# Altium PCB BUOI13.PcbDoc
Units mm, origin at the board's own origin, x right, y up, seen from the top; angles counter-clockwise.
Board outline 60 x 90 mm, 4 copper layers (Top Layer, Power, Ground, Bottom Layer), stack 0.778 mm thick; 114 components, 130 nets, 387 pads, 26 vias.
Unrouted connection lines stored in the file: 1.
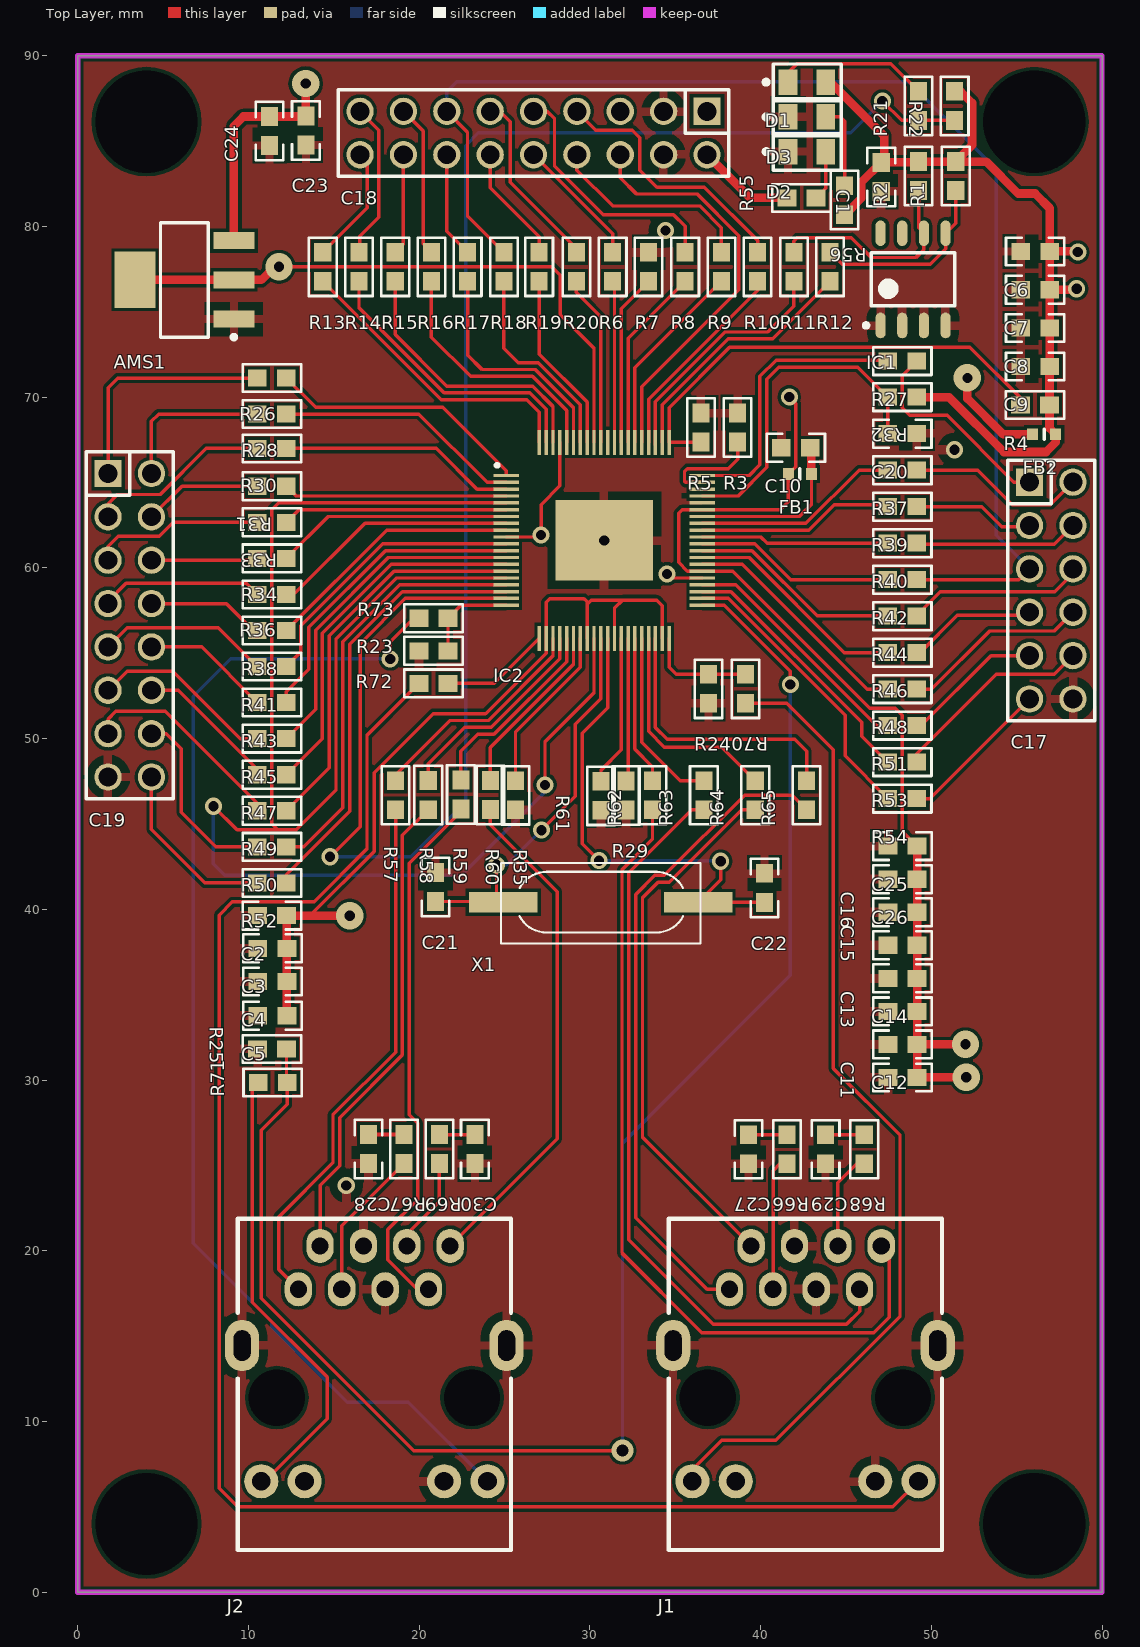
[diagram p0: Top Layer view]
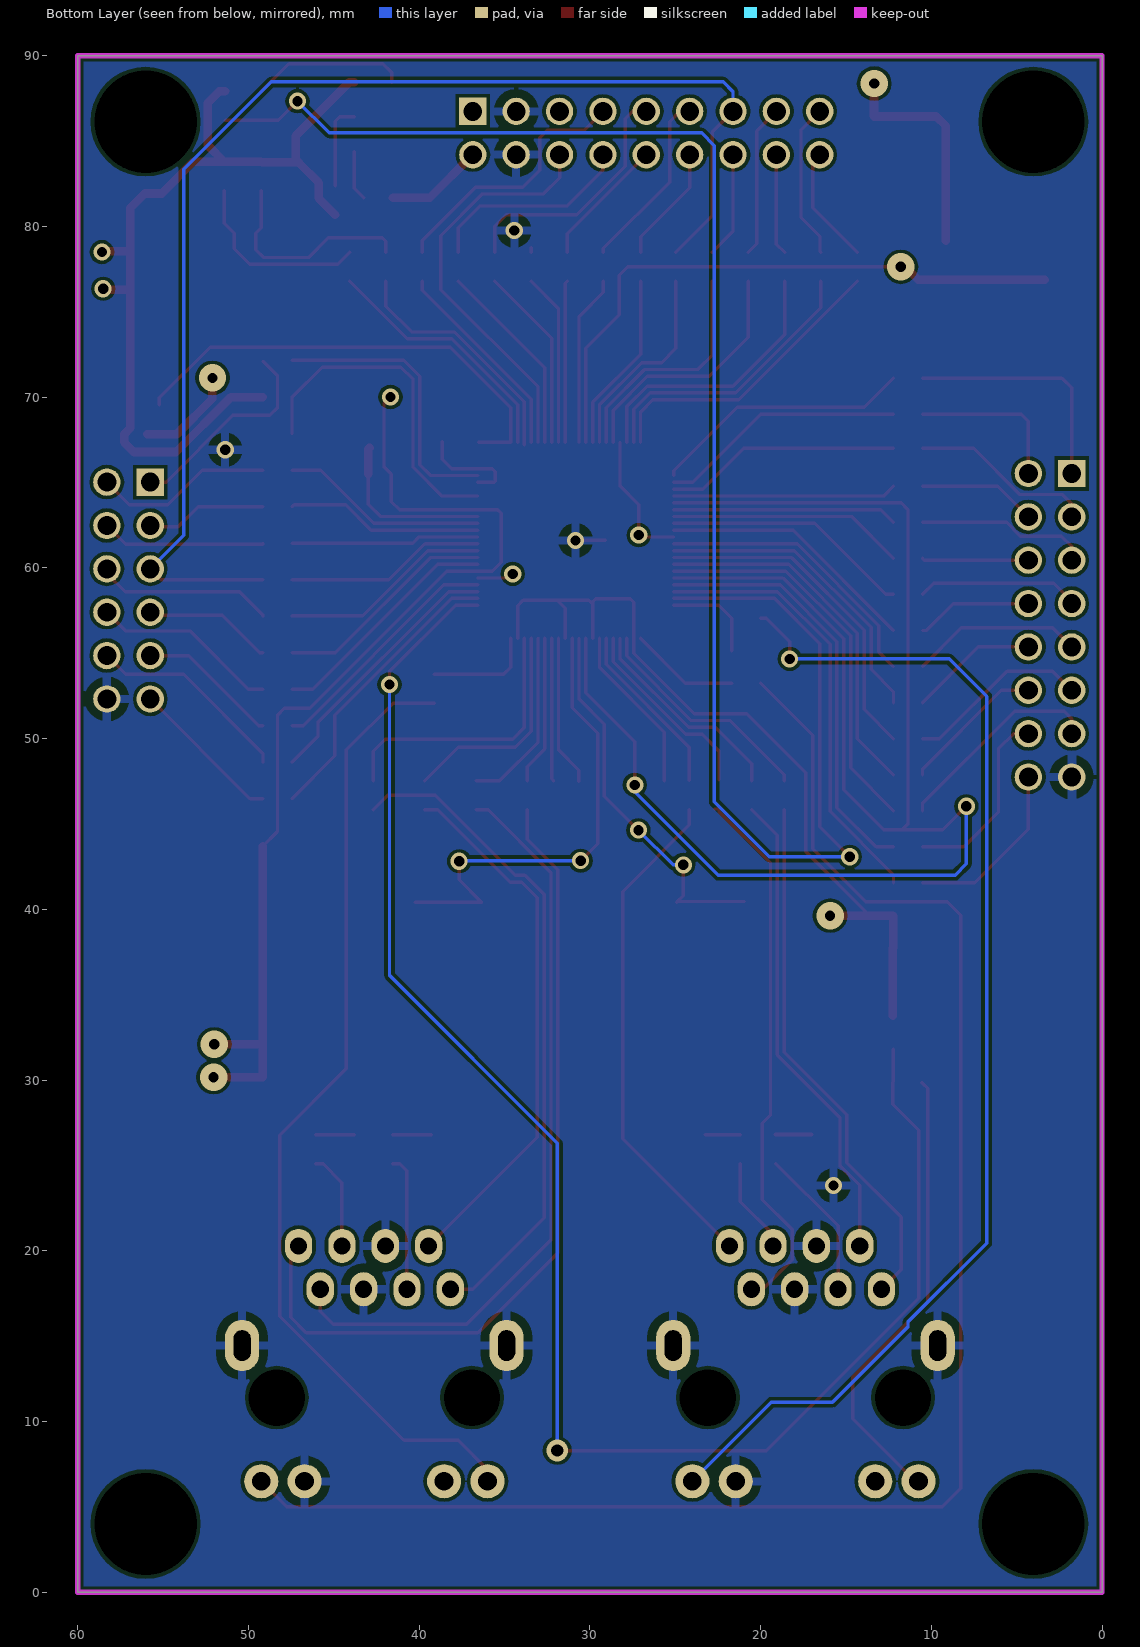
[diagram p1: Bottom Layer view, seen from below]
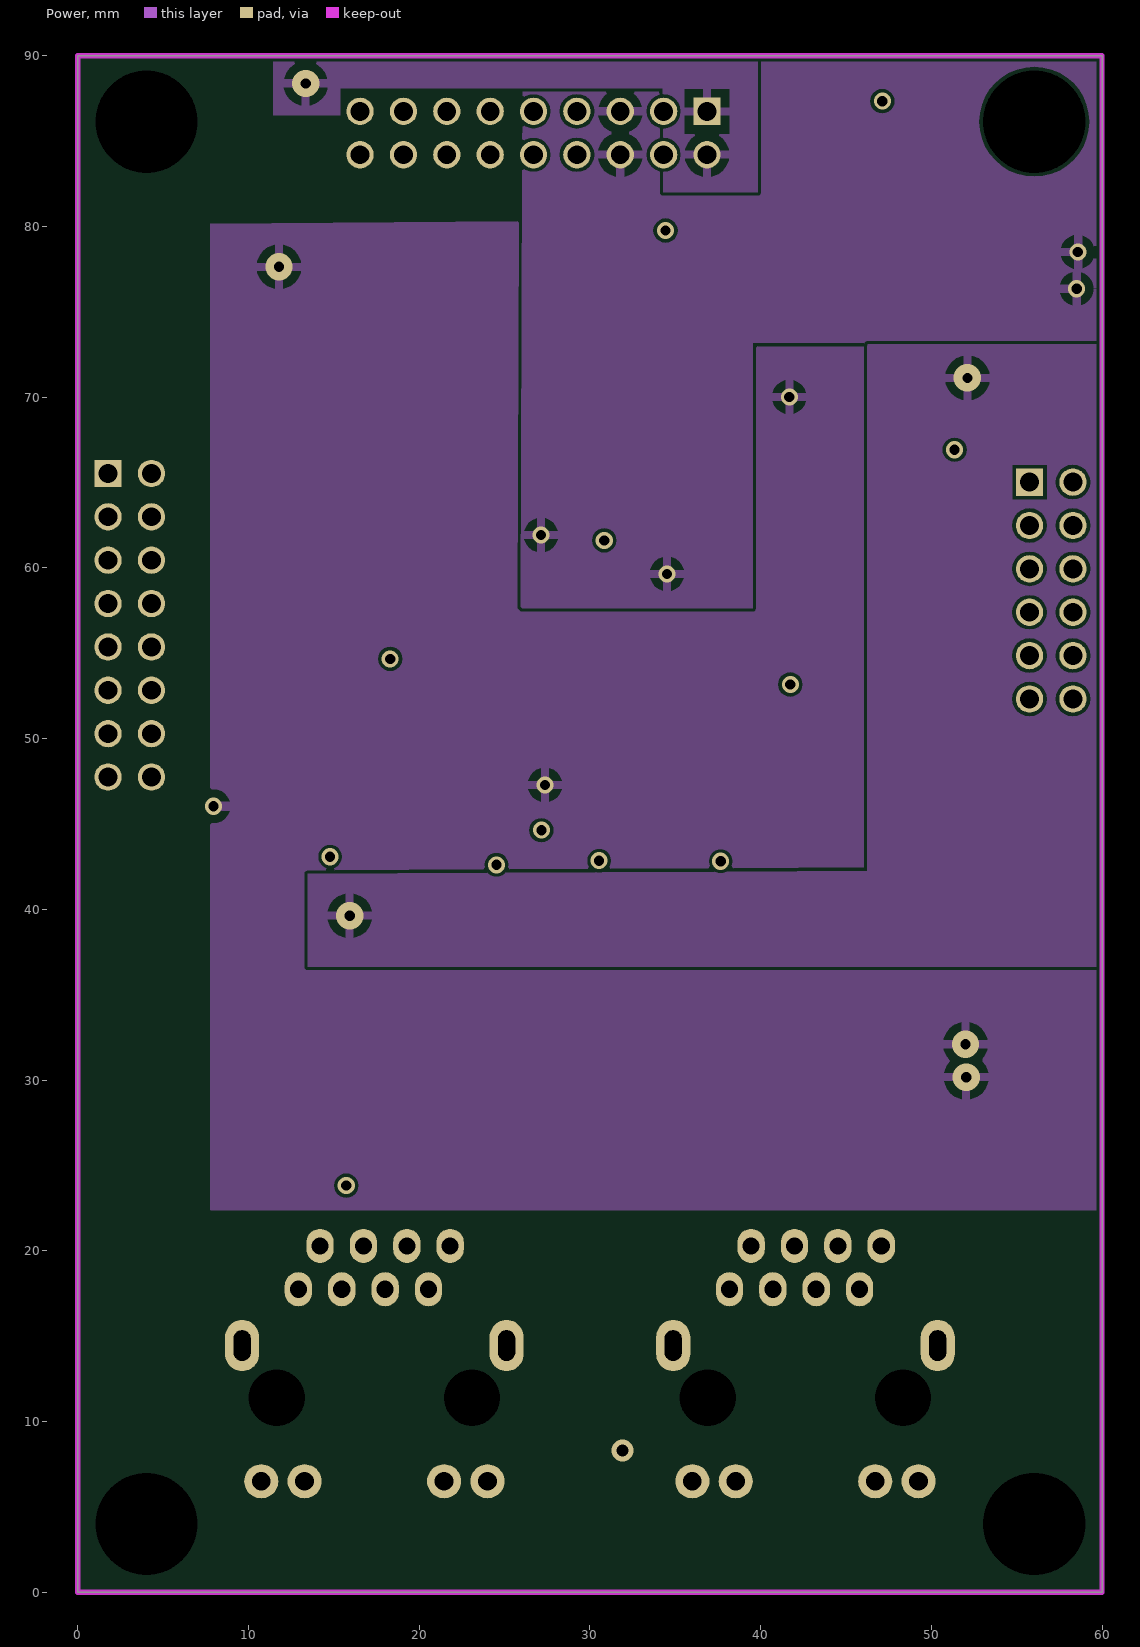
[diagram p2: Power]
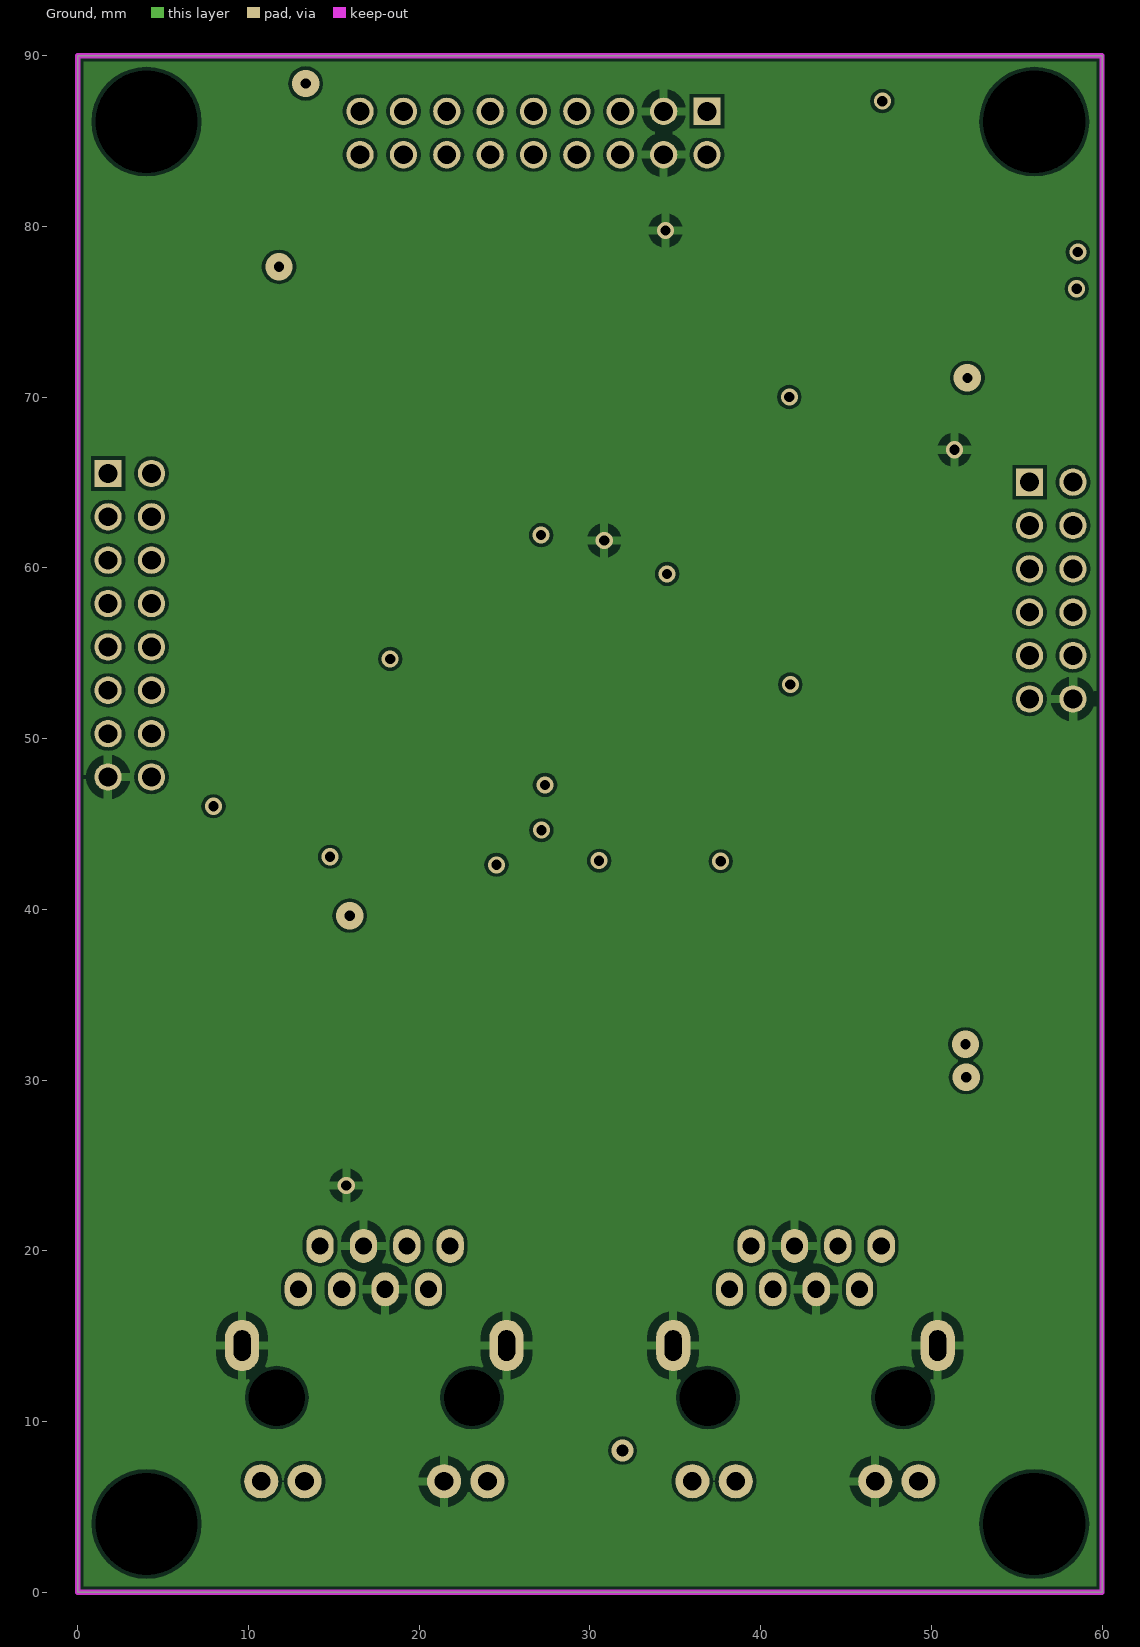
[diagram p3: Ground]
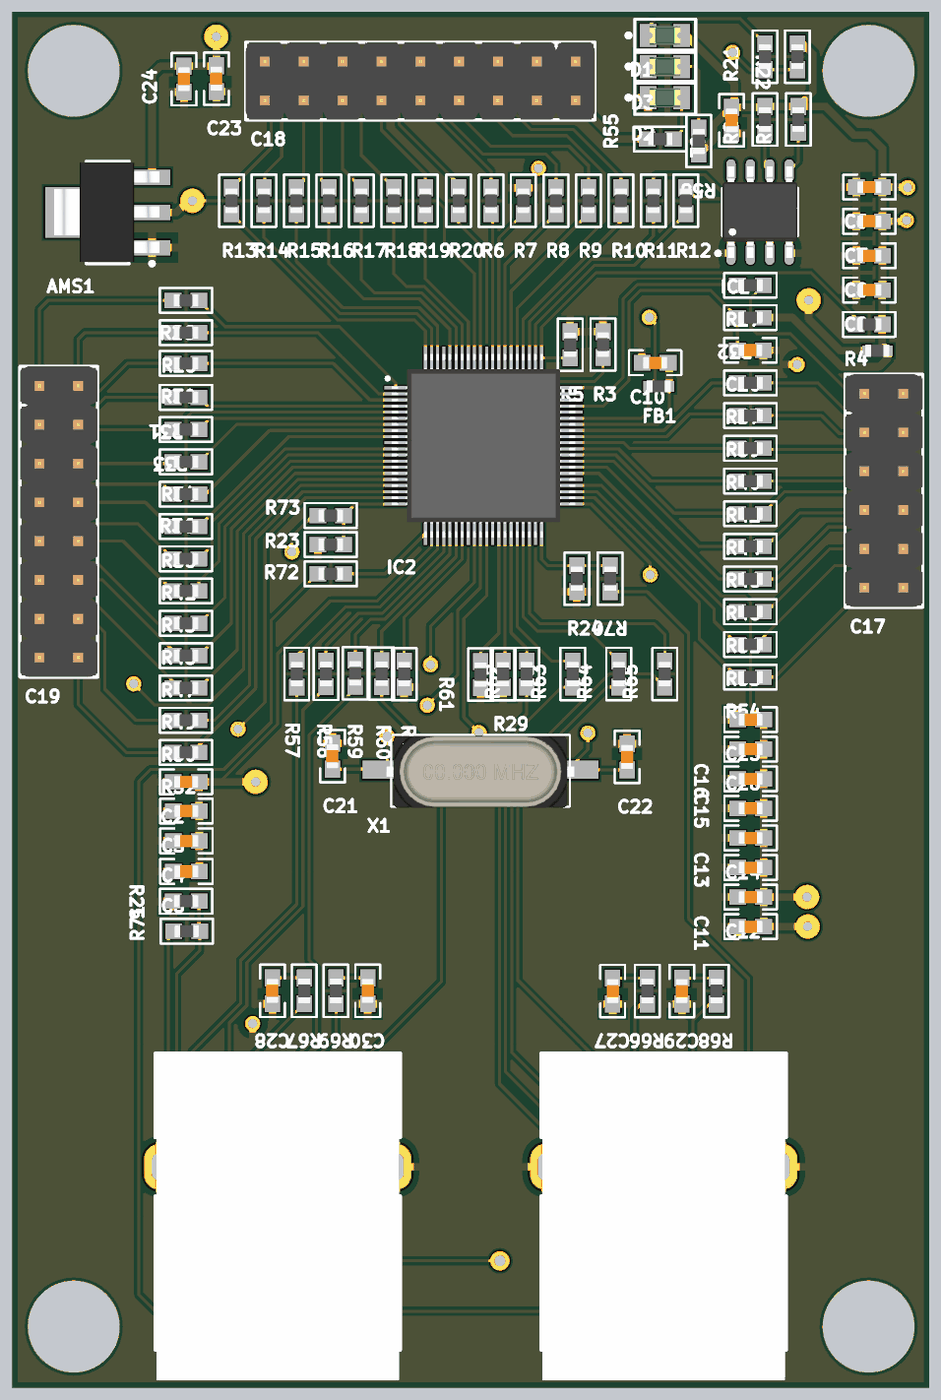
[diagram p4: 3D render of the assembled board from above, using the file's embedded part models]

## Layer stack, top to bottom
Top Solder: solder mask 0.0102, Solder Resist, Dk 3.5
Top Layer: signal copper 0.0356
Dielectric 1: core 0.254, FR-4, Dk 4.2
Power: signal copper 0.036
Dielectric 3: prepreg 0.127, Dk 4.2
Ground: signal copper 0.036
Dielectric 2: core 0.254, Dk 4.2
Bottom Layer: signal copper 0.0356
Bottom Solder: solder mask 0.0102, Solder Resist, Dk 3.5

## Board outline
0,0 60,0 60,90 0,90

## Design rules (kind name [scope] priority, off if disabled: settings)
Clearance [All] p1: gap=0.2 ignorepadtopadclearanceinfootprint=FALSE
PolygonConnect [All] p1: connectstyle=Relief reliefconductorwidth=0.5 reliefentries=4 polygonreliefangle="90 Angle" airgapwidth=0.5
RoutingVias [All] p1: holewidth=0.711 width=1.27 viastyle="Through Hole" minholewidth=0.711 minwidth=1.27 maxholewidth=0.711 maxwidth=1.27
SolderMaskExpansion [All] p1: expansion=0.102
Width [All] p1: maxlimit=0.5 minlimit=0.2 preferedwidth=0.2
30 further rules are at their usual default settings.

## Components (designator, comment, footprint, x,y, rotation, side; value= is the part's Value field where it differs from the comment)
AMS1 "AMS1117-3.3V" SOT223-4N 6.25,76.87 r180 top value="AMS1117-3.3V SOT223"
C1 "0.1uF" "CAPC-0603 (1608)" 47.065,82.9 r270 top value=33p/50V
C2 "0.1uF" "CAPC-0603 (1608)" 11.38,39.63 r0 top value=33p/50V
C3 "0.1uF" "CAPC-0603 (1608)" 11.4,37.72 r0 top value=33p/50V
C4 "0.1uF" "CAPC-0603 (1608)" 11.4,35.77 r0 top value=33p/50V
C5 "0.1uF" "CAPC-0603 (1608)" 11.4,33.77 r0 top value=33p/50V
C6 "0.1uF" "CAPC-0603 (1608)" 56.083,78.534 r0 top value=33p/50V
C7 "0.1uF" "CAPC-0603 (1608)" 56.083,76.29 r0 top value=33p/50V
C8 "0.1uF" "CAPC-0603 (1608)" 56.083,74.047 r0 top value=33p/50V
C9 "0.1uF" "CAPC-0603 (1608)" 56.083,71.803 r0 top value=33p/50V
C10 "1uF" "CAPC-0603 (1608)" 42.06,67.04 r0 top value=33p/50V
C11 "0.1uF" "CAPC-0603 (1608)" 48.31,30.16 r0 top value=33p/50V
C12 "0.1uF" "CAPC-0603 (1608)" 48.31,32.094 r0 top value=33p/50V
C13 "0.1uF" "CAPC-0603 (1608)" 48.31,34.029 r0 top value=33p/50V
C14 "0.1uF" "CAPC-0603 (1608)" 48.31,35.963 r0 top value=33p/50V
C15 "0.1uF" "CAPC-0603 (1608)" 48.31,37.897 r0 top value=33p/50V
C16 "0.1uF" "CAPC-0603 (1608)" 48.31,39.831 r0 top value=33p/50V
C17 "JP6x2" JP6-D2T 57.023,58.674 r270 top
C18 "JP9x2" JP9-D2T 26.698,85.471 r180 top
C19 "JP8x2" JP8-D2T 3.048,56.642 r270 top
C20 "0.1uF" "CAPC-0603 (1608)" 48.299,67.86 r180 top value=33p/50V
C21 "20pF" "CAPC-0603 (1608)" 20.958,41.31 r270 top value=33p/50V
C22 "20pF" "CAPC-0603 (1608)" 40.23,41.26 r270 top value=33p/50V
C23 "0.1uF" "CAPC-0603 (1608)" 13.36,85.62 r90 top value=33p/50V
C24 "10uF" "CAPC-0603 (1608)" 11.24,85.59 r90 top value=33p/50V
C25 "0.1uF" "CAPC-0603 (1608)" 48.31,43.7 r0 top value=33p/50V
C26 "10uF" "CAPC-0603 (1608)" 48.31,41.766 r0 top value=33p/50V
C27 "0.1uF" "CAPC-0603 (1608)" 39.288,25.95 r270 top value=33p/50V
C28 "0.1uF" "CAPC-0603 (1608)" 17.03,25.96 r270 top value=33p/50V
C29 "0.1uF" "CAPC-0603 (1608)" 43.808,25.95 r270 top value=33p/50V
C30 "0.1uF" "CAPC-0603 (1608)" 23.26,25.96 r270 top value=33p/50V
D1 "2V4/20mA" LED_0805_GREEN 42.708,88.45 r180 top
D2 "2V4/20mA" LED_0805_GREEN 42.708,84.38 r180 top
D3 "2V4/20mA" LED_0805_GREEN 42.708,86.415 r180 top
FB1 "BLM18EG221SN1D" BLM18EG121SH1D 42.3,65.5 r0 top
FB2 "BLM18EG221SN1D" BLM18EG121SH1D 56.605,67.83 r180 top
IC1 "AT24C32" SOIC127P600X175-8N 48.928,76.9 r90 top
IC2 "AX58100LT" QFP40P1200X1200X160-81N 30.838,61.611 r0 top
J1 "HR911105A" HR911105A 42.625,11.4 r180 top
J2 "HR911105A" HR911105A 17.375,11.4 r180 top
R1 "4.7K" "RESC-0603 (1608)" 51.428,82.95 r90 top value=13K
R2 "4.7K" "RESC-0603 (1608)" 49.25,82.95 r90 top value=13K
R3 "4.7K" "RESC-0603 (1608)" 38.65,68.23 r270 top value=13K
R4 "4.7K" "RESC-0603 (1608)" 56.07,69.55 r180 top value=13K
R5 "4.7K" "RESC-0603 (1608)" 36.51,68.22 r270 top value=13K
R6 "22" "RESC-0603 (1608)" 31.333,77.636 r90 top value=13K
R7 "4.7K" "RESC-0603 (1608)" 33.438,77.636 r90 top value=13K
R8 "22" "RESC-0603 (1608)" 35.578,77.636 r90 top value=13K
R9 "22" "RESC-0603 (1608)" 37.701,77.636 r270 top value=13K
R10 "22" "RESC-0603 (1608)" 39.824,77.636 r270 top value=13K
R11 "22" "RESC-0603 (1608)" 41.946,77.636 r270 top value=13K
R12 "22" "RESC-0603 (1608)" 44.069,77.636 r270 top value=13K
R13 "22" "RESC-0603 (1608)" 14.351,77.636 r270 top value=13K
R14 "22" "RESC-0603 (1608)" 16.474,77.636 r270 top value=13K
R15 "22" "RESC-0603 (1608)" 18.596,77.636 r270 top value=13K
R16 "22" "RESC-0603 (1608)" 20.719,77.636 r270 top value=13K
R17 "22" "RESC-0603 (1608)" 22.842,77.636 r270 top value=13K
R18 "22" "RESC-0603 (1608)" 24.965,77.636 r90 top value=13K
R19 "22" "RESC-0603 (1608)" 27.028,77.636 r270 top value=13K
R20 "22" "RESC-0603 (1608)" 29.21,77.636 r90 top value=13K
R21 "4.7K" "RESC-0603 (1608)" 49.254,87.063 r270 top value=13K
R22 "4.7K" "RESC-0603 (1608)" 51.366,87.063 r270 top value=13K
R23 "4.7K" "RESC-0603 (1608)" 20.84,55.145 r0 top value=13K
R24 "4.7K" "RESC-0603 (1608)" 36.94,52.92 r90 top value=13K
R25 "4.7K" "RESC-0603 (1608)" 11.38,31.82 r0 top value=13K
R26 "22" "RESC-0603 (1608)" 11.37,71.12 r0 top value=13K
R27 "22" "RESC-0603 (1608)" 48.299,72.11 r0 top value=13K
R28 "22" "RESC-0603 (1608)" 11.37,69.008 r0 top value=13K
R29 "4.7K" "RESC-0603 (1608)" 32.12,46.67 r90 top value=13K
R30 "22" "RESC-0603 (1608)" 11.37,67 r0 top value=13K
R31 "22" "RESC-0603 (1608)" 11.37,64.784 r0 top value=13K
R32 "4.7K" "RESC-0603 (1608)" 48.299,70 r0 top value=13K
R33 "22" "RESC-0603 (1608)" 11.37,62.672 r0 top value=13K
R34 "22" "RESC-0603 (1608)" 11.37,60.559 r0 top value=13K
R35 "4.7K" "RESC-0603 (1608)" 25.64,46.68 r90 top value=13K
R36 "22" "RESC-0603 (1608)" 11.37,58.447 r0 top value=13K
R37 "22" "RESC-0603 (1608)" 48.299,65.722 r0 top value=13K
R38 "22" "RESC-0603 (1608)" 11.37,56.335 r0 top value=13K
R39 "22" "RESC-0603 (1608)" 48.299,63.585 r0 top value=13K
R40 "22" "RESC-0603 (1608)" 48.299,61.447 r0 top value=13K
R41 "22" "RESC-0603 (1608)" 11.37,54.223 r0 top value=13K
R42 "22" "RESC-0603 (1608)" 48.299,59.309 r0 top value=13K
R43 "22" "RESC-0603 (1608)" 11.37,52.111 r0 top value=13K
R44 "22" "RESC-0603 (1608)" 48.299,57.171 r0 top value=13K
R45 "22" "RESC-0603 (1608)" 11.37,49.999 r0 top value=13K
R46 "22" "RESC-0603 (1608)" 48.299,55.033 r0 top value=13K
R47 "22" "RESC-0603 (1608)" 11.37,47.887 r0 top value=13K
R48 "22" "RESC-0603 (1608)" 48.299,52.895 r0 top value=13K
R49 "22" "RESC-0603 (1608)" 11.37,45.775 r0 top value=13K
R50 "22" "RESC-0603 (1608)" 11.37,43.663 r0 top value=13K
R51 "22" "RESC-0603 (1608)" 48.299,50.758 r0 top value=13K
R52 "22" "RESC-0603 (1608)" 11.37,41.551 r0 top value=13K
R53 "22" "RESC-0603 (1608)" 48.299,48.62 r0 top value=13K
R54 "22" "RESC-0603 (1608)" 48.299,46.482 r0 top value=13K
R55 "1K" "RESC-0603 (1608)" 42.4,81.67 r180 top value=13K
R56 "1K" "RESC-0603 (1608)" 44.92,81.54 r270 top value=13K
R57 "22" "RESC-0603 (1608)" 18.618,46.683 r270 top value=13K
R58 "22" "RESC-0603 (1608)" 20.53,46.69 r270 top value=13K
R59 "22" "RESC-0603 (1608)" 22.44,46.73 r270 top value=13K
R60 "22" "RESC-0603 (1608)" 24.17,46.7 r270 top value=13K
R61 "12.1K" "RESC-0603 (1608)" 30.648,46.65 r270 top value=13K
R62 "22" "RESC-0603 (1608)" 33.664,46.683 r270 top value=13K
R63 "22" "RESC-0603 (1608)" 36.673,46.683 r270 top value=13K
R64 "22" "RESC-0603 (1608)" 39.683,46.683 r270 top value=13K
R65 "22" "RESC-0603 (1608)" 42.692,46.683 r270 top value=13K
R66 "22" "RESC-0603 (1608)" 41.548,25.95 r270 top value=13K
R67 "22" "RESC-0603 (1608)" 19.107,25.96 r270 top value=13K
R68 "22" "RESC-0603 (1608)" 46.068,25.95 r270 top value=13K
R69 "22" "RESC-0603 (1608)" 21.183,25.96 r270 top value=13K
R70 "1K" "RESC-0603 (1608)" 39.12,52.92 r270 top value=13K
R71 "1K" "RESC-0603 (1608)" 11.42,29.86 r180 top value=13K
R72 "1K" "RESC-0603 (1608)" 20.84,53.24 r180 top value=13K
R73 "1K" "RESC-0603 (1608)" 20.84,57.05 r180 top value=13K
X1 "25M" XTAL-RU49/4 35.588,40.42 r180 top value=4Mhz

## Footprints (in the part's own frame and the unit in brackets; to place one, negate y for a bottom-side part, rotate by r counter-clockwise, add the part's x,y. Pads: shape width x height; smd on the part's side, far side on the other; paste and mask are expansions set on the pad)
BLM18EG121SH1D [mm]
  rect 0.65x0.7 smd: 1(-0.675,0) 2(0.675,0)
  silkscreen extent 0,-0.3 0,0.3, body extent -0.8,-0.4 0.8,0.4, height 0.8
"CAPC-0603 (1608)" [mm] "Resistor, Chip; 1.60 mm L X 0.80 mm W X 0.50 mm H body"
  rect 1.1x1 smd mask+0.1: 1(-0.85,0) 2(0.85,0)
  silkscreen extent -1.71,-0.81 1.71,0.81, body extent -0.8,-0.4 0.8,0.4, height 0.6
HR911105A [mm] "Hanrun HR911105A RJ-45 Connector"
  round 1 hole 3.3 unplated paste+0 mask+0.15: 0(-5.715,0) 0(5.715,0)
  oval 1.6x2 hole 1 paste+0 mask+0.15: 1(4.45,-6.35) 2(3.18,-8.89) 3(1.91,-6.35) 4(0.64,-8.89) 5(-0.63,-6.35) 6(-1.9,-8.89) 7(-3.17,-6.35) 8(-4.44,-8.89)
  round 2 hole 1.1 paste+0 mask+0.15: 9(6.625,4.9) 10(4.085,4.9) 11(-4.085,4.9) 12(-6.625,4.9)
  oval 2x3 hole 1 slot 1.8 at 90 deg paste+0 mask+0.15: 13(7.745,-3.05) 14(-7.745,-3.05)
  silkscreen extent -8,-10.48 8,8.92, body extent -7.94,-10.48 7.94,10.92, height 13.6
JP6-D2T [mm] "12 pins, dual pin, straight, gold plating"
  rect 1.6x1.6 hole 1.1: 1(-6.35,-1.27)
  round 1.6 hole 1.1: 2(-3.81,-1.27) 3(-1.27,-1.27) 4(1.27,-1.27) 5(3.81,-1.27) 6(6.35,-1.27) 7(6.35,1.27) 8(3.81,1.27) 9(1.27,1.27) 10(-1.27,1.27) 11(-3.81,1.27) 12(-6.35,1.27)
  silkscreen extent -7.62,-2.54 7.62,2.54, body extent -7.62,-2.54 7.62,2.54, height 8.55
JP8-D2T [mm] "16 pins, dual pin, straight, gold plating"
  rect 1.6x1.6 hole 1.1: 1(-8.89,-1.27)
  round 1.6 hole 1.1: 2(-6.35,-1.27) 3(-3.81,-1.27) 4(-1.27,-1.27) 5(1.27,-1.27) 6(3.81,-1.27) 7(6.35,-1.27) 8(8.89,-1.27) 9(8.89,1.27) 10(6.35,1.27) 11(3.81,1.27) 12(1.27,1.27) 13(-1.27,1.27) 14(-3.81,1.27) 15(-6.35,1.27) 16(-8.89,1.27)
  silkscreen extent -10.16,-2.54 10.16,2.54, body extent -10.16,-2.54 10.16,2.54, height 8.55
JP9-D2T [mm] "18 pins, dual pin, straight, gold plating"
  rect 1.6x1.6 hole 1.1: 1(-10.16,-1.27)
  round 1.6 hole 1.1: 2(-7.62,-1.27) 3(-5.08,-1.27) 4(-2.54,-1.27) 5(0,-1.27) 6(2.54,-1.27) 7(5.08,-1.27) 8(7.62,-1.27) 9(10.16,-1.27) 10(10.16,1.27) 11(7.62,1.27) 12(5.08,1.27) 13(2.54,1.27) 14(0,1.27) 15(-2.54,1.27) 16(-5.08,1.27) 17(-7.62,1.27) 18(-10.16,1.27)
  silkscreen extent -11.43,-2.54 11.43,2.54, body extent -11.43,-2.54 11.43,2.54, height 8.55
LED_0805_GREEN [mm] "LED SMD; Body 2.0 x 1.3 mm (LxW typ)"
  rect 1.1x1.5 smd: 1(-1.1,0) 2(1.1,0)
  silkscreen extent -2.01,-1.07 2.52,1.09, body extent -1.01,-0.63 1.01,0.62, height 1.1
QFP40P1200X1200X160-81N [mm]
  rect 1.475x0.2 smd: 1(-5.738,3.8) 2(-5.738,3.4) 3(-5.738,3) 4(-5.738,2.6) 5(-5.738,2.2) 6(-5.738,1.8) 7(-5.738,1.4) 8(-5.738,1) 9(-5.738,0.6) 10(-5.738,0.2) 11(-5.738,-0.2) 12(-5.738,-0.6) 13(-5.738,-1) 14(-5.738,-1.4) 15(-5.738,-1.8) 16(-5.738,-2.2) 17(-5.738,-2.6) 18(-5.738,-3) 19(-5.738,-3.4) 20(-5.738,-3.8) 41(5.738,-3.8) 42(5.738,-3.4) 43(5.738,-3) 44(5.738,-2.6) 45(5.738,-2.2) 46(5.738,-1.8) 47(5.738,-1.4) 48(5.738,-1) 49(5.738,-0.6) 50(5.738,-0.2) 51(5.738,0.2) 52(5.738,0.6) 53(5.738,1) 54(5.738,1.4) 55(5.738,1.8) 56(5.738,2.2) 57(5.738,2.6) 58(5.738,3) 59(5.738,3.4) 60(5.738,3.8)
  rect 0.2x1.475 smd: 21(-3.8,-5.738) 22(-3.4,-5.738) 23(-3,-5.738) 24(-2.6,-5.738) 25(-2.2,-5.738) 26(-1.8,-5.738) 27(-1.4,-5.738) 28(-1,-5.738) 29(-0.6,-5.738) 30(-0.2,-5.738) 31(0.2,-5.738) 32(0.6,-5.738) 33(1,-5.738) 34(1.4,-5.738) 35(1.8,-5.738) 36(2.2,-5.738) 37(2.6,-5.738) 38(3,-5.738) 39(3.4,-5.738) 40(3.8,-5.738) 61(3.8,5.738) 62(3.4,5.738) 63(3,5.738) 64(2.6,5.738) 65(2.2,5.738) 66(1.8,5.738) 67(1.4,5.738) 68(1,5.738) 69(0.6,5.738) 70(0.2,5.738) 71(-0.2,5.738) 72(-0.6,5.738) 73(-1,5.738) 74(-1.4,5.738) 75(-1.8,5.738) 76(-2.2,5.738) 77(-2.6,5.738) 78(-3,5.738) 79(-3.4,5.738) 80(-3.8,5.738)
  rect 5.69x4.72 smd: 81(0,0)
  silkscreen extent -6.37,4.3 -6.17,4.5, body extent -6,-6 6,6, height 1.6
"RESC-0603 (1608)" [mm] "Resistor, Chip; 1.60 mm L X 0.80 mm W X 0.50 mm H body"
  rect 1.1x1 smd mask+0.1: 1(-0.85,0) 2(0.85,0)
  silkscreen extent -1.71,-0.81 1.71,0.81, body extent -0.8,-0.4 0.8,0.4, height 0.5
SOIC127P600X175-8N [mm] "SOIC, 8-Leads, Body 4.90x3.90mm, Pitch 1.27mm, IPC Medium Density"
  oval 1.5x0.6 smd: 1(-2.7,1.905) 2(-2.7,0.635) 3(-2.7,-0.635) 4(-2.7,-1.905) 5(2.7,-1.905) 6(2.7,-0.635) 7(2.7,0.635) 8(2.7,1.905)
  silkscreen extent -2.82,-2.45 1.55,2.88, body extent -3,-2.45 3,2.45, height 1.75
SOT223-4N [mm] "SOT223, 4-Leads, Body 6.5x3.5mm, Pitch 2.3mm, Lead Span 7mm, IPC Medium Density"
  rect 2.4x1 smd: 1(-2.9,2.3) 2(-2.9,0) 3(-2.9,-2.3)
  rect 2.4x3.3 smd: 4(2.9,0)
  silkscreen extent -3.03,-3.35 1.4,3.47, body extent -3.39,-3.27 3.5,3.23, height 1.72
XTAL-RU49/4 [mm]
  rect 4x1.2 smd: 1(-0.762,0) 2(10.668,0)
  silkscreen extent -0.89,-2.29 10.8,2.41, body extent -1.2,-2.22 11.1,2.48, height 4.3

## Part data
AMS1: library part AMS1117, "D醤", Chung_Loai=D醤, Don_Vi=Con, Ma_Hang=MH000596
C1 C2 C3 C4 C5 C6 C7 C8 C9 C10 C11 C12 C13 C14 C15 C16 C20 C21 C22 C23 C24 C25 C26 C27 C28 C29 C30: library part 0603N330J500CT, "CAP CER 33pF 50V 5%  0603", MPN="CL10C330JB8NNNC, 0603N330J500CT", Category=CAPACITOR, CompanyID=VT-01106, PinCount=2, Solder=SMT
C17: "WR-PHD 2.54 mm Dual Socket Header", Manufacturer="Würth Elektronik eiSos GmbH", partNo=61301221821, ComponentLink1 Description=Manufacturer, ComponentLink1URL=http://www.we-online.com, ComponentLink2 Description=Datasheet, ComponentLink2URL=http://katalog.we-online.de/em/datasheet/6130xx21821.pdf, Created by="Karrer Zheng", Created Date="29 March 2013", NoPins=12
C18: "WR-PHD 2.54 mm Dual Socket Header", Manufacturer="Würth Elektronik eiSos GmbH", partNo=61301821821, ComponentLink1 Description=Manufacturer, ComponentLink1URL=http://www.we-online.com, ComponentLink2 Description=Datasheet, ComponentLink2URL=http://katalog.we-online.de/em/datasheet/6130xx21821.pdf, Created by="Karrer Zheng", Created Date="29 March 2013", NoPins=18
C19: "WR-PHD 2.54 mm Dual Socket Header", Manufacturer="Würth Elektronik eiSos GmbH", partNo=61301621821, ComponentLink1 Description=Manufacturer, ComponentLink1URL=http://www.we-online.com, ComponentLink2 Description=Datasheet, ComponentLink2URL=http://katalog.we-online.de/em/datasheet/6130xx21821.pdf, Created by="Karrer Zheng", Created Date="29 March 2013", NoPins=16
D1 D2 D3: library part 17-21/G6C-FM1N2B/3T, "LED GREEN CLEAR 2V4 20mA 0805 SMD", CompanyID=VT-00393, MPN=17-21/G6C-FM1N2B/3T, Solder=SMT
FB1 FB2: "Ferrite Bead", Manufacturer_Name="Murata Electronics", Mouser Part Number=81-BLM18EG221SN1D, Arrow Part Number=BLM18EG221SN1D, Arrow Price/Stock=https://www.arrow.com/en/products/blm18eg221sn1d/murata-manufacturing?region=europe, Datasheet Link=http://www.murata.com/~/media/webrenewal/support/library/catalog/products/emc/emifil/c31e.ashx?la=en-gb, Height=0.95mm, Manufacturer_Part_Number=BLM18EG221SN1D, Mouser Price/Stock=https://www.mouser.co.uk/ProductDetail/Murata-Electronics/BLM18EG221SN1D?qs=uSeJpk%2F8In2DDeSj2a4KGA%3D%3D
IC1: "Integrated Circuit", Manufacturer_Name=Microchip, Mouser Part Number=N/A, Datasheet Link=https://ww1.microchip.com/downloads/en/DeviceDoc/doc0336.pdf, Height=5.334mm, Manufacturer_Part_Number=AT24C32, Mouser Price/Stock=https://www.mouser.co.uk/ProductDetail/Microchip-Technology-Atmel/AT24C32?qs=HbI%2FMOA3e15bWuuoyy2xIw%3D%3D
IC2: "Integrated Circuit", Manufacturer_Name=ASIX, Datasheet Link=https://cdn.infinigo.com/pdf/8fbda183-acaa-42bd-9b7a-1a435fa63bee.pdf?t=1653368662&k=22be6ea2ab67c3bbe73e3c295d80e3b4, Height=1.6mm, Manufacturer_Part_Number=AX58100LT
J1 J2: "Hanrun HR911105A RJ-45 Connector", MFR=HanRun, MPN=HR911105A, Solder=WAVE
R1 R2 R3 R4 R5 R6 R7 R8 R9 R10 R11 R12 R13 R14 R15 R16 R17 R18 R19 R20 R21 R22 R23 R24 R25 R26 R27 R28 R29 R30 R31 R32 R33 R34 R35 R36 R37 R38 R39 R40 R41 R42 R43 R44 R45 R46 R47 R48 R49 R50 R51 R52 R53 R54 R55 R56 R57 R58 R59 R60 R61 R62 R63 R64 R65 R66 R67 R68 R69 R70 R71 R72 R73: library part AC0603FR-0713KL, "RES SMD 13K OHM 1% 1/10W 0603", Category=RESISTOR, CompanyID=VT-00329, MPN=AC0603FR-0713KL, Solder=SMT
X1: library part XT2, "Crystal, 32.768 KHz, -40 to 85 degC, 3.2 x 1.5 x 0.9 mm SMD"

## Free pads (board coordinates)
  oval 1.6x2.5 hole 6: ""(4.028,4) ""(4.028,86.137) ""(56.028,4) ""(56.028,86.137)

## Via types
v1: diameter 1, hole 0.6, Top Layer to Bottom Layer, 19 vias
v2: diameter 1.6, hole 0.6, Top Layer to Bottom Layer, 6 vias
v3: diameter 1.27, hole 0.711, Top Layer to Bottom Layer, 1 vias

## Nets (pads, with @x,y where several pads share a name; then routed paths per layer and width w, separated by ;. In a path a pad name is that pad's centre, name@x,y a point inside that pad or via, vN(x,y) a via of type N, cw(c..) or ccw(c..) an arc to the next point about the centre after c; other vN are vias at no path point)
+1.2VA: C10.2 FB1.2 IC2.54 | length 10
  Top Layer w0.2: IC2.54 42.261,63.011 42.98,63.73 FB1.2@42.98,65.35 ; FB1.2@42.91,65.565 FB1.2
  Top Layer w0.5: C10.2 42.975,66.975 FB1.2
+1.2VD: AMS1.2 AMS1.4 C11.2 C12.2 C13.2 C14.2 C15.2 C16.2 C25.2 C26.2 FB1.1 IC2.5 IC2.16 IC2.29 IC2.46 IC2.55 IC2.72 | length 193.9
  Top Layer w0.2: v1(7.95,46.04) 9.33,44.66 11.72,44.66 ; v2@11.37,77.216 v2(11.79,77.636) 27.774,77.636 28.27,77.14 28.27,74.84 30.238,72.872 IC2.72 ; IC2.16 18.69,59.411 15.13,55.851 15.13,47 12.79,44.66 11.72,44.66 ; IC2.5 11.763,63.811 11.37,63.418 11.37,45.01 11.72,44.66 ; v1(27.37,47.29) 27.37,49.82 30.238,52.688 IC2.29 ; v1(41.68,70.01) 42.06,69.63 42.06,65.935 FB1.1 41.625,63.886 41.15,63.411 IC2.55 35.411,63.411 35.2,63.2 35.2,60.325 35.714,59.811 IC2.46 38.379,59.811 46.4,51.79 47.891,51.79 48.299,51.382 48.299,44.561 C25.2
  Top Layer w0.5: AMS1.4 AMS1.2 10.76,76.87 11.526,77.636 v2(11.79,77.636) ; C25.2 C26.2 C16.2 C15.2 C14.2 C13.2 C12.2 ; v2(52,32.1) 51.994,32.094 C12.2 ; v2(52.04,30.17) 52.03,30.16 C11.2 C12.2
  Bottom Layer w0.2: v1(7.95,46.04) 7.95,42.66 8.61,42 22.48,42 27.37,46.89 v1(27.37,47.29)
+3.3V: C2.2 C3.2 C4.2 C5.2 FB2.2 IC2.22 IC2.28 IC2.32 IC2.39 | length 55
  Top Layer w0.2: 13.6,39.63 17.36,43.39 17.36,48 20.82,51.46 23.887,51.46 27.438,55.011 IC2.22 27.438,57.988 27.64,58.19 29.655,58.19 29.838,58.007 29.838,57.872 ; IC2.28 29.838,57.872 ; IC2.32 31.438,57.639 31.909,58.11 ; IC2.39 34.238,57.792 33.92,58.11 31.909,58.11 ; 29.838,57.872 30.076,58.11 31.909,58.11
  Top Layer w0.5: C5.2 C4.2 C3.2 12.23,37.74 C2.2 13.6,39.63 v2(15.93,39.63) ; v2(52.11,71.13) 52.11,69.92 54.2,67.83 FB2.2
+3.3VD: C1.1 C6.2 C7.2 C8.2 C9.2 C18.3 C18.16 D1.1 FB2.1 IC2.10 IC2.45 IC2.65 IC2.77 R1.2 R2.2 R4.1 R22.1 R32.2 R56.2 | length 87.7
  Top Layer w0.2: IC2.10 27.031,61.811 v1(27.14,61.92) 27.14,63.71 28.238,64.808 IC2.77 ; C18.16 31.778,82.85 32.728,81.9 36.294,81.9 38.728,79.466 38.728,76.298 33.038,70.608 IC2.65 ; v1(34.52,59.65) 34.759,59.411 IC2.45
  Top Layer w0.5: D1.1 44.1,88.45 47.234,85.316 47.234,83.919 C1.1 ; R56.2 44.93,80.69 45.88,81.64 45.88,82.565 C1.1 ; R32.2 51.04,70 54.25,66.79 56.72,66.79 57.28,67.35 FB2.1 56.92,68.19 R4.1 56.92,71.79 C9.2 C8.2 C7.2 ; R22.1 51.707,87.913 52.38,87.24 52.38,84.752 R1.2 ; v1(58.51,76.35) 58.45,76.29 C7.2 ; v1(58.58,78.5) 58.546,78.534 C6.2 ; C1.1 49.2,83.75 R2.2 R1.2 ; R1.2 53.21,83.8 55.08,81.93 56.07,81.93 56.933,81.067 C6.2 ; C7.2 C6.2
  Bottom Layer w0.5: C18.16 C18.16@31.838,84.141
+5V: AMS1.3 C18.1 C18.18 C23.2 C24.2 R55.2 | length 18.9
  Top Layer w0.5: AMS1.3 9.15,85.88 9.71,86.44 C24.2 13.33,86.44 C23.2 13.36,88.36 v2(13.35,88.37) ; C18.18 39.389,81.67 R55.2
  Bottom Layer w0.5: C18.1 C18.1@36.897,86.78
A0: C18.6 R20.2 | length 10.7
  Top Layer w0.2: C18.6 24.724,86.741 25.328,86.137 25.328,82.6 29.21,78.718 R20.2
A2: C17.10 R44.2 | length 10.5
  Top Layer w0.2: R44.2 49.149,57.226 50.523,58.6 57.228,58.6 58.293,59.665 C17.10
A3: C19.14 R34.1 | length 6.2
  Top Layer w0.2: C19.14 10.413,60.452 R34.1
A4: C19.13 R38.1 | length 6.9
  Top Layer w0.2: C19.13 8.716,57.912 10.293,56.335 R38.1
A5: C19.12 R43.1 | length 7.6
  Top Layer w0.2: C19.12 7.259,55.372 R43.1
A6: C19.11 R47.1 | length 8.4
  Top Layer w0.2: C19.11 5.896,52.832 10.52,48.208 R47.1
A7: C19.10 R50.1 | length 11.1
  Top Layer w0.2: C19.10 5.178,50.292 6.07,49.4 6.07,45.68 8.087,43.663 R50.1
A8: C17.5 R51.2 | length 8.3
  Top Layer w0.2: R51.2 49.386,50.758 53.492,54.864 C17.5
A9: C17.4 R46.2 | length 7.6
  Top Layer w0.2: R46.2 49.335,55.033 51.528,57.226 55.575,57.226 C17.4
A10: C17.3 C18.7 R18.2 R42.2 | length 76.4
  Top Layer w0.2: C18.7 22.828,85.531 22.828,80.623 R18.2 ; R42.2 55.118,59.309 C17.3
  Bottom Layer w0.2: C18.7 21.618,87.898 22.19,88.47 48.66,88.47 53.79,83.34 53.79,61.907 C17.3
A11: C17.2 R39.2 | length 7.1
  Top Layer w0.2: R39.2 52.943,63.585 54.128,62.4 55.669,62.4 C17.2
A12: C17.6 R54.2 | length 9
  Top Layer w0.2: R54.2 49.911,46.482 C17.6
A13: C18.15 R9.1 | length 12.2
  Top Layer w0.2: C18.15 29.238,83.29 31.328,81.2 36.428,81.2 37.701,79.927 R9.1
D0: C17.8 R53.2 | length 12
  Top Layer w0.2: R53.2 49.149,49.121 53.792,53.764 57.193,53.764 C17.8
D1: C17.9 R48.2 | length 11
  Top Layer w0.2: R48.2 50.001,52.895 53.41,56.304 57.193,56.304 C17.9
D2: C19.15 R31.1 | length 6.9
  Top Layer w0.2: C19.15 6.11,64.784 R31.1
D3: C17.11 R40.2 | length 9.7
  Top Layer w0.2: R40.2 49.149,61.384 57.193,61.384 C17.11
D4: C17.1 R27.2 | length 12.3
  Top Layer w0.2: R27.2 48.299,71.26 48.299,69.376 48.745,68.93 50.92,68.93 54.826,65.024 C17.1
D5: C17.12 R37.2 | length 10.5
  Top Layer w0.2: R37.2 52.706,65.722 54.728,63.7 56.969,63.7 C17.12
D6: C18.5 R8.2 | length 14.8
  Top Layer w0.2: C18.5 27.487,86.741 27.928,86.3 27.928,83.537 30.77,80.695 34.895,80.695 35.578,80.012 R8.2
D7: C18.14 R6.2 | length 7.6
  Top Layer w0.2: C18.14 31.333,79.566 R6.2
D8: C18.13 R19.1 | length 6.9
  Top Layer w0.2: C18.13 24.158,82.27 27.028,79.4 R19.1
D9: C18.12 R17.1 | length 6.2
  Top Layer w0.2: C18.12 21.618,79.71 R17.1
D10: C18.8 R16.1 | length 8.9
  Top Layer w0.2: C18.8 20.228,85.591 20.228,78.977 R16.1
D11: C19.4 R36.1 | length 9.6
  Top Layer w0.2: C19.4 1.778,58.05 2.828,59.1 9.867,59.1 R36.1
D12: C19.5 R41.1 | length 10.2
  Top Layer w0.2: C19.5 2.906,56.5 8.243,56.5 R41.1
D13: C19.6 R45.1 | length 10.8
  Top Layer w0.2: C19.6 2.905,53.959 5.569,53.959 9.529,49.999 R45.1
D14: C19.7 R49.1 | length 12.5
  Top Layer w0.2: C19.7 1.778,51.15 2.228,51.6 5.128,51.6 10.52,46.208 R49.1
D15: C19.9 R52.1 | length 10.6
  Top Layer w0.2: C19.9 4.318,44.682 7.449,41.551 R52.1
"EEP DONE": IC2.21 R72.1 | length 6.4
  Top Layer w0.2: R72.1 24.405,53.24 IC2.21
GND: AMS1.1 C1.2 C2.1 C3.1 C4.1 C5.1 C6.1 C7.1 C8.1 C9.1 C10.1 C11.1 C12.1 C13.1 C14.1 C15.1 C16.1 C17.7 C18.2 C18.17 C19.8 C20.1 C21.1 C22.1 C23.1 C24.1 C25.1 C26.1 C27.2 C28.2 C29.2 C30.2 D2.2 D3.2 IC1.1 IC1.2 IC1.3 IC1.4 IC2.56 IC2.81 J1.4 J1.5 J1.11 J1.13 J1.14 J2.4 J2.5 J2.11 J2.13 J2.14 R3.1 R5.1 R7.2 R23.1 R24.1 R25.1 R29.1 R35.1 R61.2 | length 2
  Top Layer w0.2: v1(15.73,23.82) v1@15.74,23.82 ; IC2.81@29.091,61.611 v1(30.838,61.611) ; R7.2 R7.2@33.438,78.768
  other v1: 51.36,66.92 34.43,79.76
"I2C SCL": IC1.5 R1.1 R12.1 | length 11.1
  Top Layer w0.2: R12.1 44.775,77.78 49.93,77.78 50.833,78.683 IC1.5 51.428,80.195 R1.1
"I2C SDA": IC1.6 R2.1 R11.1 | length 12.6
  Top Layer w0.2: R11.1 41.946,79.126 42.156,79.336 45.314,79.336 46.47,78.18 49.1,78.18 49.563,78.643 IC1.6 49.25,79.913 R2.1
IRQ: C19.1 R26.1 | length 14
  Top Layer w0.2: C19.1 1.778,70.55 2.348,71.12 R26.1
"LED ERR": IC2.20 R23.2 R73.1 | length 5.6
  Top Layer w0.2: R23.2 R73.1 22.451,57.811 IC2.20
"LED RUN": IC2.19 R21.2 R22.2 | length 100.8
  Top Layer w0.2: v1(14.78,43.08) 16.543,44.843 16.543,55.567 19.187,58.211 IC2.19 ; v1(47.13,87.34) 48.257,86.213 R21.2 R22.2
  Bottom Layer w0.2: v1(14.78,43.08) 19.5,43.08 22.718,46.298 22.718,84.738 23.46,85.48 45.27,85.48 v1(47.13,87.34)
LRDn: C18.4 R10.1 | length 15.5
  Top Layer w0.2: C18.4 30.338,85.641 32.487,85.641 32.928,85.2 32.928,83.3 33.928,82.3 36.7,82.3 39.824,79.176 R10.1
LRDY: C19.3 R33.1 | length 10.1
  Top Layer w0.2: C19.3 1.778,61.261 2.382,61.865 4.785,61.865 5.591,62.672 R33.1
LWRn: C18.11 R15.1 | length 5.9
  Top Layer w0.2: R15.1 19.078,78.968 C18.11
NetC20_2: C20.2 IC2.57 R32.1 | length 19.9
  Top Layer w0.2: IC2.57 38.687,64.211 40.36,65.884 40.36,71.05 41.07,71.76 45.689,71.76 R32.1 C20.2
NetC21_2: C21.2 IC2.30 X1.2 | length 22.4
  Top Layer w0.2: C21.2 X1.2@24.88,40.46 ; v1(24.53,42.61) 24.53,40.81 X1.2@24.88,40.46 ; X1.2 X1.2@24.88,40.46 ; v1(27.16,44.64) 29.15,46.63 29.15,50.84 30.638,52.328 IC2.30
  Bottom Layer w0.2: v1(24.53,42.61) 25.13,42.61 v1(27.16,44.64)
NetC22_2: C22.2 IC2.31 X1.1 | length 28
  Top Layer w0.2: v1(30.54,42.85) 29.55,43.84 29.55,50.32 31.038,51.808 IC2.31 ; v1(37.66,42.82) 37.66,41.73 X1.1 36.36,40.41 C22.2
  Bottom Layer w0.2: v1(30.54,42.85) 37.63,42.85 v1(37.66,42.82)
NetC27_1: C27.1 R66.1 | length 2.3
  Top Layer w0.2: C27.1 R66.1
NetC28_1: C28.1 R67.1 | length 2.1
  Top Layer w0.254: C28.1 R67.1
NetC29_1: C29.1 R68.1 | length 2.3
  Top Layer w0.2: C29.1 R68.1
NetC30_1: C30.1 R69.1 | length 2.1
  Top Layer w0.2: R69.1 C30.1
NetD1_2: D1.2 R21.1 | length 9.1
  Top Layer w0.2: D1.2 41.608,89.018 42.13,89.54 47.627,89.54 R21.1
NetD2_1: D2.1 R55.1 | length 2.9
  Top Layer w0.2: R55.1 43.808,82.228 D2.1
NetD3_1: D3.1 R56.1 | length 5
  Top Layer w0.2: D3.1 44.655,86.415 44.92,86.15 R56.1
NetIC2_1: IC2.1 R26.2 | length 15.4
  Top Layer w0.2: R26.2 13.932,69.408 21.382,69.408 25.1,65.69 IC2.1
NetIC2_2: IC2.2 R28.2 | length 14.5
  Top Layer w0.2: R28.2 19.982,69.008 23.979,65.011 IC2.2
NetIC2_3: IC2.3 R30.2 | length 13.9
  Top Layer w0.2: R30.2 20.997,67 23.386,64.611 IC2.3
NetIC2_4: IC2.4 R31.2 | length 13.1
  Top Layer w0.2: R31.2 12.793,64.211 IC2.4
NetIC2_6: IC2.6 R33.2 | length 13.2
  Top Layer w0.2: R33.2 12.959,63.411 IC2.6
NetIC2_7: IC2.7 R34.2 | length 13.9
  Top Layer w0.2: R34.2 14.672,63.011 IC2.7
NetIC2_8: IC2.8 R36.2 | length 14.6
  Top Layer w0.2: R36.2 12.664,58.447 16.828,62.611 IC2.8
NetIC2_9: IC2.9 R38.2 | length 15.3
  Top Layer w0.2: R38.2 18.096,62.211 IC2.9
NetIC2_11: IC2.11 R41.2 | length 16.8
  Top Layer w0.2: R41.2 13.07,55.073 13.07,56.62 17.861,61.411 IC2.11
NetIC2_12: IC2.12 R43.2 | length 18.4
  Top Layer w0.2: R43.2 12.22,52.749 13.53,54.059 13.53,56.514 18.027,61.011 IC2.12
NetIC2_13: IC2.13 R45.2 | length 20
  Top Layer w0.2: R45.2 13.93,51.709 13.93,56.348 18.193,60.611 IC2.13
NetIC2_14: IC2.14 R47.2 | length 21.6
  Top Layer w0.2: R47.2 14.33,49.997 14.33,56.182 18.359,60.211 IC2.14
NetIC2_15: IC2.15 R49.2 | length 23.2
  Top Layer w0.2: R49.2 14.73,48.285 14.73,56.017 18.524,59.811 IC2.15
NetIC2_17: IC2.17 R50.2 | length 24.9
  Top Layer w0.2: R50.2 13.243,43.663 15.53,45.95 15.53,55.685 18.856,59.011 IC2.17
NetIC2_18: IC2.18 R52.2 | length 26
  Top Layer w0.2: R52.2 12.22,42.04 15.93,45.75 15.93,55.52 19.021,58.611 IC2.18
NetIC2_23: IC2.23 R57.1 | length 13.5
  Top Layer w0.2: R57.1 18.618,47.888 21.79,51.06 24.052,51.06 27.838,54.846 IC2.23
NetIC2_24: IC2.24 R58.1 | length 12.4
  Top Layer w0.2: R58.1 20.53,48.53 22.66,50.66 24.218,50.66 28.238,54.68 IC2.24
NetIC2_25: IC2.25 R59.1 | length 11.4
  Top Layer w0.2: R59.1 22.44,49.27 23.43,50.26 24.384,50.26 28.638,54.514 IC2.25
NetIC2_26: IC2.26 R60.1 | length 10.3
  Top Layer w0.2: R60.1 24.17,49.481 29.038,54.349 IC2.26
NetIC2_33: IC2.33 R61.1 | length 8.9
  Top Layer w0.2: R61.1 30.648,48.148 31.838,49.338 IC2.33
NetIC2_35: IC2.35 R62.1 | length 8.8
  Top Layer w0.2: IC2.35 32.638,49.392 33.664,48.366 R62.1
NetIC2_36: IC2.36 R63.1 | length 10.7
  Top Layer w0.2: IC2.36 33.038,49.792 35.297,47.533 R63.1
NetIC2_37: IC2.37 R64.1 | length 12.9
  Top Layer w0.2: IC2.37 33.438,50.422 34.36,49.5 37.716,49.5 R64.1
NetIC2_38: IC2.38 R65.1 | length 16.4
  Top Layer w0.2: IC2.38 33.838,50.652 34.52,49.97 41.99,49.97 42.692,49.268 R65.1
NetIC2_42: IC2.42 R54.1 | length 17.1
  Top Layer w0.2: IC2.42 38.099,58.211 44.945,51.365 44.945,48.986 R54.1
NetIC2_43: IC2.43 R53.1 | length 15.5
  Top Layer w0.2: IC2.43 38.265,58.611 45.928,50.948 45.928,50.141 R53.1
NetIC2_44: IC2.44 R51.1 | length 14.3
  Top Layer w0.2: IC2.44 38.549,59.011 46.802,50.758 R51.1
NetIC2_47: IC2.47 R48.1 | length 13.9
  Top Layer w0.2: IC2.47 38.917,60.211 46.233,52.895 R48.1
NetIC2_48: IC2.48 R46.1 | length 13.2
  Top Layer w0.2: IC2.48 39.33,60.611 44.907,55.033 R46.1
NetIC2_49: IC2.49 R44.1 | length 12.5
  Top Layer w0.2: IC2.49 39.495,61.011 43.306,57.2 47.42,57.2 R44.1
NetIC2_50: IC2.50 R42.1 | length 11.8
  Top Layer w0.2: IC2.50 39.661,61.411 41.772,59.3 47.44,59.3 R42.1
NetIC2_51: IC2.51 R40.1 | length 11
  Top Layer w0.2: IC2.51 40.017,61.811 40.381,61.447 R40.1
NetIC2_52: IC2.52 R39.1 | length 11.5
  Top Layer w0.2: IC2.52 42.821,62.211 44.31,63.7 47.334,63.7 R39.1
NetIC2_53: IC2.53 R37.1 | length 12.2
  Top Layer w0.2: IC2.53 42.655,62.611 45.767,65.722 R37.1
NetIC2_60: IC2.60 R27.1 | length 16.7
  Top Layer w0.2: IC2.60 39.321,65.411 39.96,66.05 39.96,71.216 40.904,72.16 R27.1@47.449,72.16
NetIC2_62: IC2.62 R12.2 | length 15
  Top Layer w0.2: IC2.62 34.238,69.557 38.101,73.42 40.703,73.42 R12.2
NetIC2_63: IC2.63 R11.2 | length 14.4
  Top Layer w0.2: IC2.63@33.838,67.2 IC2.63 33.838,69.722 37.936,73.82 40.43,73.82 41.946,75.336 R11.2
NetIC2_64: IC2.64 R10.2 | length 12.1
  Top Layer w0.2: IC2.64 33.438,69.888 39.824,76.274 R10.2
NetIC2_66: IC2.66 R9.2 | length 11.5
  Top Layer w0.2: IC2.66 32.638,71.723 R9.2
NetIC2_67: IC2.67 R8.1 | length 10.8
  Top Layer w0.2: IC2.67 32.238,73.446 R8.1
NetIC2_68: IC2.68 R7.1 | length 10.1
  Top Layer w0.2: IC2.68 31.838,75.186 R7.1
NetIC2_69: IC2.69 R6.1 | length 9.5
  Top Layer w0.2: R6.1 31.438,76.681 IC2.69
NetIC2_71: IC2.71 R20.1 | length 10
  Top Layer w0.2: R20.1 29.21,76.14 30.638,74.712 IC2.71
NetIC2_73: IC2.73 R19.2 | length 10.6
  Top Layer w0.2: R19.2 27.028,72.526 29.838,69.716 IC2.73
NetIC2_74: IC2.74 R18.1 | length 12
  Top Layer w0.2: R18.1 24.965,72.855 25.8,72.02 26.968,72.02 29.438,69.55 IC2.74
NetIC2_75: IC2.75 R17.2 | length 13.8
  Top Layer w0.2: R17.2 22.842,72.458 23.68,71.62 26.803,71.62 29.038,69.385 IC2.75
NetIC2_76: IC2.76 R16.2 | length 14.8
  Top Layer w0.2: R16.2 20.719,73.509 23.008,71.22 26.637,71.22 28.638,69.219 IC2.76
NetIC2_78: IC2.78 R15.2 | length 16.2
  Top Layer w0.2: R15.2 18.596,73.672 21.618,70.65 26.641,70.65 27.838,69.453 IC2.78
NetIC2_79: IC2.79 R14.2 | length 16.9
  Top Layer w0.2: R14.2 16.474,75.229 21.453,70.25 26.476,70.25 27.438,69.288 IC2.79
NetIC2_80: IC2.80 R13.2 | length 17.6
  Top Layer w0.2: R13.2 21.287,69.85 26.31,69.85 27.038,69.122 IC2.80
NetJ1_3: J1.3 R66.2 | length 7.9
  Top Layer w0.2: J1.3 40.728,17.763 40.728,24.7 41.128,25.1 R66.2
NetJ1_6: J1.6 R68.2 | length 5.7
  Top Layer w0.2: J1.6 44.525,23.997 45.628,25.1 R68.2
NetJ1_9: J1.9 R70.2 | length 57.8
  Top Layer w0.2: J1.9@35.85,6.35 J1.9 36,7.18 37.718,8.898 40.891,8.898 48.165,16.171 48.165,26.775 44.26,30.68 44.26,49.338 41.528,52.07 R70.2
NetJ1_12: J1.12 R72.2 | length 96.8
  Top Layer w0.2: R72.2 16.943,50.193 16.943,43.539 13.844,40.44 9.06,40.44 8.28,39.66 8.28,6.09 9.37,5 47.75,5 J1.12
NetJ2_3: J2.3 R67.2 | length 8.9
  Top Layer w0.2: J2.3 15.465,21.468 R67.2
NetJ2_6: J2.6 R69.2 | length 5.6
  Top Layer w0.2: J2.6 19.275,20.965 21.183,22.873 R69.2
NetJ2_9: J2.9 R71.2 | length 27.2
  Top Layer w0.2: R71.2 10.22,29.51 10.22,17 14.61,12.61 14.61,10.16 10.95,6.5 J2.9 J2.9@10.65,6.4
NetJ2_12: J2.12 R73.2 | length 70.9
  Top Layer w0.2: v1(18.3,54.67) 18.3,55.68 19.67,57.05 R73.2
  Bottom Layer w0.2: v1(18.3,54.67) 8.96,54.67 6.76,52.47 6.76,20.45 11.37,15.84 11.37,15.55 15.79,11.13 19.37,11.13 J2.12
"P0 ACT": IC2.40 R24.2 R70.1 | length 6.3
  Top Layer w0.2: IC2.40 34.638,54.192 35.06,53.77 R24.2 R70.1
"P0 RXIN": J1.8 R62.2 | length 49
  Top Layer w0.2: R62.2 33.664,44.1 31.88,42.316 31.88,19.873 36.553,15.2 46.628,15.2 47.528,16.1 47.528,19.827 J1.8
"P0 RXIP": J1.7 R63.2 | length 44.6
  Top Layer w0.2: R63.2 35.963,45.833 32.28,42.15 32.28,20.648 37.228,15.7 45.028,15.7 45.795,16.467 J1.7
"P0 SD": IC2.34 R29.2 | length 8.4
  Top Layer w0.2: R29.2 32.238,47.638 IC2.34
"P0 TXON": J1.2 R64.2 | length 31.8
  Top Layer w0.2: J1.2 33.08,26.655 33.08,40.682 33.988,41.59 34.66,41.59 38.903,45.833 R64.2
"P0 TXOP": J1.1 R65.2 | length 38.9
  Top Layer w0.2: J1.1 36.86,17.75 32.68,21.93 32.68,40.87 33.8,41.99 34.365,41.99 39.058,46.683 41.842,46.683 R65.2
"P1 ACT": IC2.41 R25.2 R71.1 | length 96.6
  Top Layer w0.2: R25.2 12.23,29.9 R71.1 12.27,28.58 10.75,27.06 10.75,17.23 19.68,8.3 v3(31.91,8.3) ; IC2.41 37.869,57.811 41.74,53.94 v1(41.74,53.17)
  Bottom Layer w0.2: v3(31.91,8.3) 31.91,26.3 41.74,36.13 v1(41.74,53.17)
"P1 RXIN": J2.8 R60.2 | length 29.8
  Top Layer w0.2: J2.8 28.08,26.555 28.08,41.04 24.17,44.95 R60.2
"P1 RXIP": J2.7 R59.2 | length 31.9
  Top Layer w0.2: J2.7 19.878,17.75 18.156,19.472 18.156,21.249 19.907,22.999 19.907,27.484 19.42,27.971 19.42,42.69 22.44,45.71 R59.2 R59.2@22.7,45.88
"P1 SD": IC2.27 R35.2 | length 9.9
  Top Layer w0.2: R35.2 25.64,50.385 29.438,54.183 IC2.27
"P1 TXON": J2.2 R58.2 | length 28.2
  Top Layer w0.2: J2.2 14.195,23.839 15.35,24.994 15.35,27.8 19.02,31.47 19.02,44.33 R58.2
"P1 TXOP": J2.1 R57.2 | length 31.4
  Top Layer w0.2: J2.1 11.77,18.905 11.77,21.98 14.95,25.16 14.95,27.966 18.618,31.634 R57.2
"PDI EMU": IC2.61 R4.2 R5.2 | length 27.6
  Top Layer w0.2: R5.2 34.659,67.37 IC2.61 34.638,69.391 38.177,72.93 52.25,72.93 55.22,69.96 R4.2
"SCS ESC": C18.9 R14.1 | length 9.2
  Top Layer w0.2: R14.1 16.525,78.537 16.525,79.415 17.638,80.528 17.638,85.641 C18.9
"SCS FUNC": C18.10 R13.1 | length 7
  Top Layer w0.2: R13.1 16.95,81.085 16.95,83.789 C18.10
SYNC0: C19.16 R28.1 | length 9.4
  Top Layer w0.2: C19.16 4.318,68.59 4.736,69.008 R28.1
SYNC1: C19.2 R30.1 | length 10.8
  Top Layer w0.2: C19.2 1.778,63.75 2.328,64.3 4.828,64.3 7.528,67 R30.1
TEST: IC2.59 R3.2 | length 6.1
  Top Layer w0.2: IC2.59 35.6,65.011 35.538,65.072 35.538,65.635 35.714,65.811 38.091,65.811 38.65,66.37 R3.2
pads on no net: IC1.7 IC1.8 IC2.58 IC2.70 J1.0 J1.10 J2.0 J2.10

## Polygon pours and split planes (outlines as drawn)
GND on Bottom Layer "GND_L04_P136" (solid, remove dead copper, pour order 136): 0,90 0,0 60,0 60,90
GND on Bottom Layer "GND_L04_P106" (solid, remove dead copper, pour order 106): 0,90
+5V on Bottom Layer "+5V_L04_P026" (solid, remove dead copper, pour order 26): 36.858,86.741
+5V on Bottom Layer "+5V_L04_P022" (solid, remove dead copper, pour order 22): 14.98,76.92
+3.3VD on Power "VCC3IO_L02_P100" (solid, remove dead copper, pour order 100): 60,73.1 60,90 39.84,90 39.51,89.67 39.51,73.18
+3.3VD on Power "VCC3IO_L02_P098" (solid, remove dead copper, pour order 98): 25.94,57.63 39.53,57.63 39.53,90 26.07,90
+1.2VD on Power "VCCK_L02_P102" (solid, remove dead copper, pour order 102): 7.75,80.17 7.75,22.34 7.8,22.39 60,22.39 60,80.56
+3.3V on Power "VCC33A_L02_P096" (solid, remove dead copper, pour order 96): 13.44,42.08 13.46,42.06 13.46,36.63 59.99,36.63 60,36.64 60,73.1 46.26,73.1 46.25,73.11 46.24,73.1 46.24,42.26
+5V on Power "+5V_L02_P094" (solid, remove dead copper, pour order 94): 13.44,42.08
+5V on Power "+5V_L02_P092" (solid, remove dead copper, pour order 92): 12.9,37.13
+5V on Power "+5V_L02_P086" (solid, remove dead copper, pour order 86): 34.29,82 39.83,82 39.84,82.01 39.84,90 11.46,90 11.46,86.51 11.45,86.5 15.38,86.5 15.38,88.1 34.23,88.1 34.28,88.05
+1.2VD on Power "VCCK_L02_P076" (solid, remove dead copper, pour order 76): 39.88,70.78
+1.2VD on Power "VCCK_L02_P070" (solid, remove dead copper, pour order 70): 49.12,43.89
GND on Power "GND_L02_P064" (solid, remove dead copper, pour order 64): 60.01,26.24
+3.3VD on Power "VCC3IO_L02_P038" (solid, remove dead copper, pour order 38): 4.29,45.723
+3.3VD on Power "VCC3IO_L02_P034" (solid, remove dead copper, pour order 34): 31.94,58.62
GND on Ground "GND_L03_P116" (solid, remove dead copper, pour order 116): 0,90 0,0 60,0 60,90
GND on Top Layer "GND_L01_P134" (solid, remove dead copper, pour order 134): 0,90 0,0 60,0 60,90

## Keep-outs
Keep-Out Layer:
  the board outline again, w0.3